# EAGLE board DrivePDU (EAGLE 9.1.3)
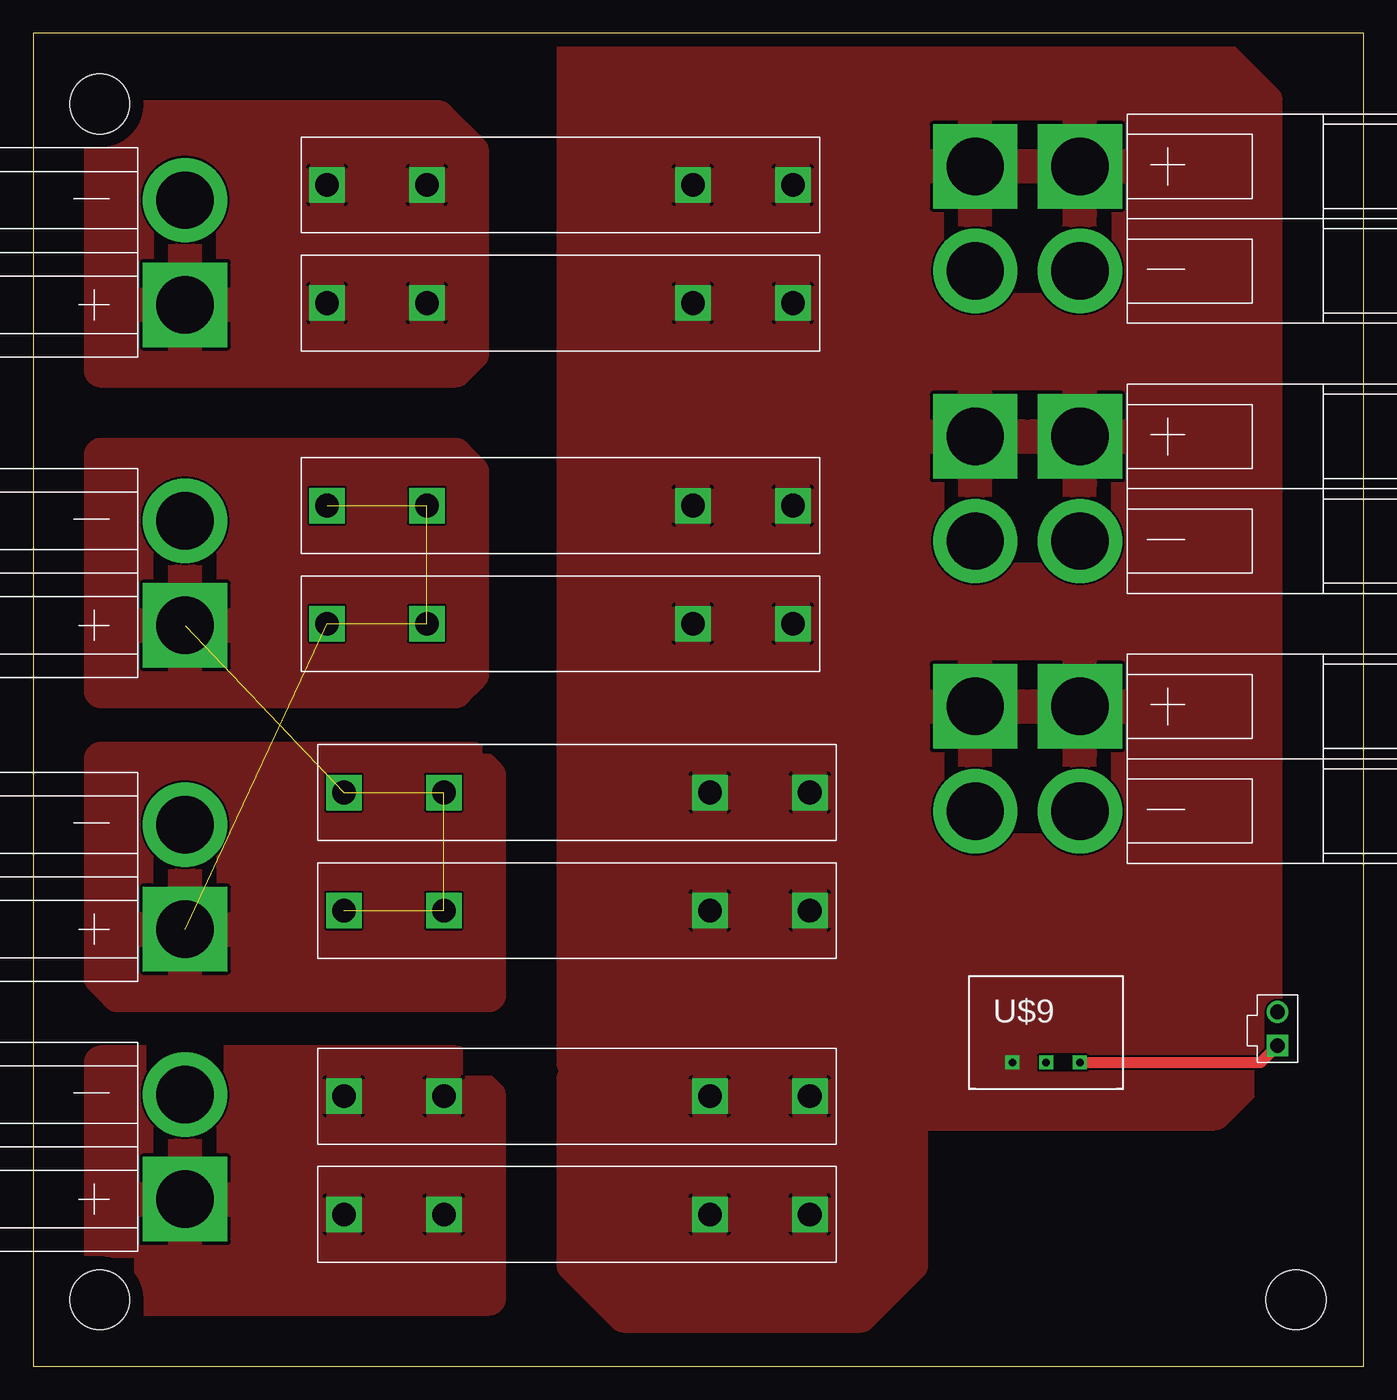
[diagram p0: board, top side]
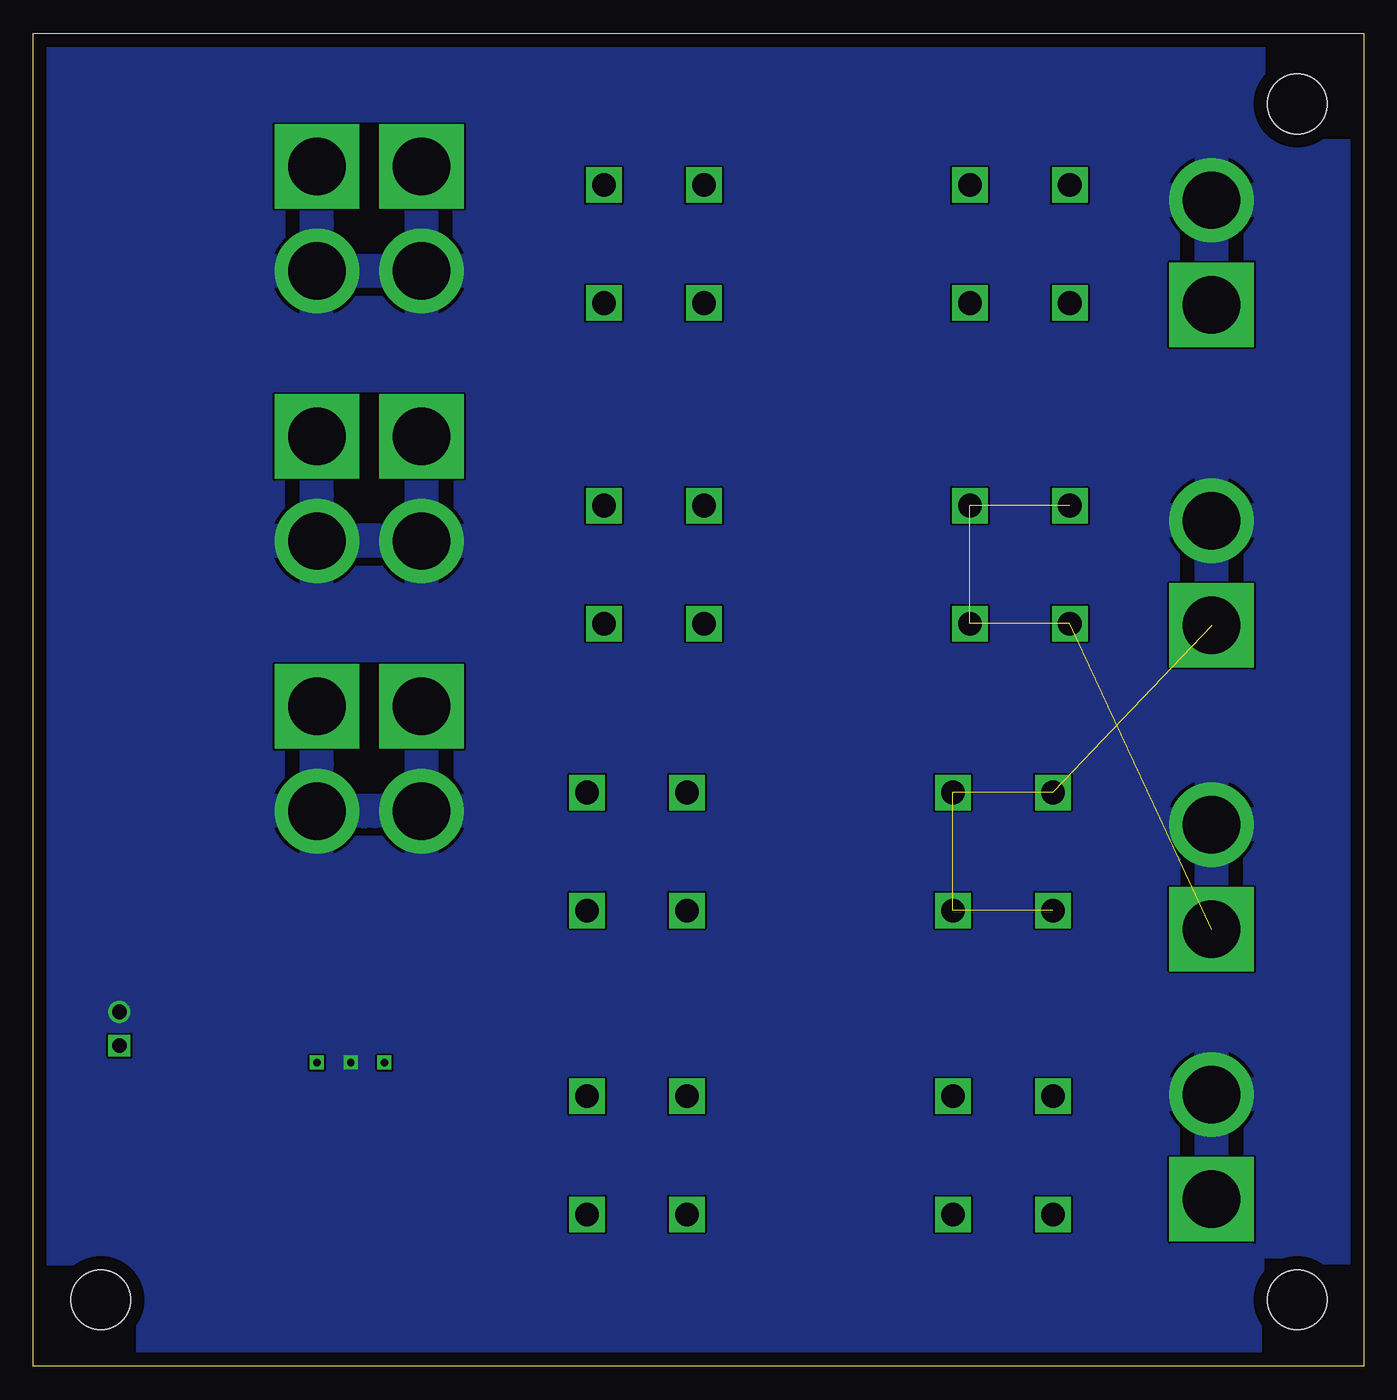
[diagram p1: board, bottom side, seen from below]

Size 100.08 x 100.32 mm. Coordinates in mm from the lower left corner, seen from the top.
Outline: 0,0 100.08,0 100.08,100.32 0,100.32 0,0
Copper layers (1*16): Top 0.035mm / dielectric 1.5mm / Bottom 0.035mm
Design rules "default": minimum track width 6mil, minimum drill 0.35mm, track to track 6mil, track to pad 6mil, pad to pad 6mil, via to via 6mil, smd to smd 6mil, copper to edge 40mil, drill to drill 6mil, minimum pad ring 10mil, minimum via ring 8mil, stop-mask expansion 4mil, vias tented up to drill 0mil, thermal gap 10mil
Holes 4.5 mm at 95,5 5,95 5,5

## Footprints (pad centres in the part's own frame; a part is rotated, then mirrored left to right if it is on the bottom)
PP45_HOR_4GRD = drill 4.318 pad 6.35 square: +_1 0,3.937; +_2 -7.874,3.937 | drill 4.318 pad 6.35: -_1 0,-3.937; -_2 -7.874,-3.937
PP45_HOR_2BOT = drill 4.318 pad 6.35 square: + 0,3.937 | drill 4.318 pad 6.35: - 0,-3.937
AMP-MTE-2MALE = drill 1.092 square: P$1 -1.27,0 | drill 1.092: P$2 1.27,0
R-78E3.3-0.5 = drill 0.55 square: +VIN -2.54,0; GND 0,0; VOUT 2.54,0
01220090Z = drill 1.78 square: P$1 0,0; P$2 0,7.52; P$3 0,27.53; P$4 0,35.05

## Placement (x,y rotation side)
U$1  PP45_HOR_4GRD  [PP45_HOR_4GRD]  78.74,86.36 0 top
U$2  PP45_HOR_4GRD  [PP45_HOR_4GRD]  78.74,66.04 0 top
U$3  PP45_HOR_4GRD  [PP45_HOR_4GRD]  78.74,45.72 0 top
U$4  PP45_HOR_2BOT  [PP45_HOR_2BOT]  11.43,83.82 180 top
U$5  PP45_HOR_2BOT  [PP45_HOR_2BOT]  11.43,59.69 180 top
U$6  PP45_HOR_2BOT  [PP45_HOR_2BOT]  11.43,36.83 180 top
U$7  PP45_HOR_2BOT  [PP45_HOR_2BOT]  11.43,16.51 180 top
U$8  AMP-MTE-2MALE  [AMP-MTE-2MALE]  93.6,25.4 90 top
U$9  R-78E3.3-0.5  [R-78E3.3-0.5]  76.2,22.86 0 top
U$10  30A_FUSE  [01220090Z]  57.15,88.9 90 top
U$11  30A_FUSE  [01220090Z]  57.15,80.01 90 top
U$12  30A_FUSE  [01220090Z]  57.15,64.77 90 top
U$13  30A_FUSE  [01220090Z]  57.15,55.88 90 top
U$14  30A_FUSE  [01220090Z]  58.42,43.18 90 top
U$15  30A_FUSE  [01220090Z]  58.42,34.29 90 top
U$16  30A_FUSE  [01220090Z]  58.42,20.32 90 top
U$17  30A_FUSE  [01220090Z]  58.42,11.43 90 top

## Library data of the parts
U$1-U$8 = SPEAR
U$9-U$17 = SPEAR-PDU

## Nets
+VFUSED: U$1.+_1 U$1.+_2 U$2.+_1 U$2.+_2 U$3.+_1 U$3.+_2 U$9.+VIN U$10.P$1 U$10.P$2 U$11.P$1 U$11.P$2 U$12.P$1 U$12.P$2 U$13.P$1 U$13.P$2 U$14.P$1 U$14.P$2 U$15.P$1 U$15.P$2 U$16.P$1 U$16.P$2 U$17.P$1 U$17.P$2
GND: U$1.-_1 U$1.-_2 U$2.-_1 U$2.-_2 U$3.-_1 U$3.-_2 U$4.- U$5.- U$6.- U$7.- U$8.P$2 U$9.GND
N$2: U$8.P$1 U$9.VOUT
N$3: U$4.+ U$10.P$3 U$10.P$4 U$11.P$3 U$11.P$4
N$4: U$7.+ U$16.P$3 U$16.P$4 U$17.P$3 U$17.P$4
N$5: U$5.+ U$14.P$3 U$14.P$4 U$15.P$3 U$15.P$4
N$6: U$6.+ U$12.P$3 U$12.P$4 U$13.P$3 U$13.P$4

## Tracks (layer width: path | path; a pad name or v marks a point on that pad's centre or on a via)
+VFUSED
  pour Top: 40.64,99.06 40.64,22.86 44.45,19.05 88.9,19.05 92.71,22.86 92.71,95.25 88.9,99.06
  pour Top: 40.64,21.59 40.64,7.62 44.45,3.81 62.23,3.81 63.5,5.08 66.04,7.62 66.04,19.05
GND
  pour Bottom: 1.27,99.06 110.49,99.06 110.49,-1.27 1.27,-1.27
N$2
  Top 0.813: U$9.VOUT 92.33,22.86 U$8.P$1
N$3
  pour Top: 5.08,93.98 5.08,74.93 31.75,74.93 33.02,76.2 33.02,91.44 30.48,93.98 6.35,93.98
N$4
  pour Top: 5.08,22.86 5.08,5.08 34.29,5.08 34.29,20.32 33.02,21.59 31.75,22.86 30.48,22.86
N$5  (4 unrouted)
  pour Top: 5.08,68.58 5.08,50.8 31.75,50.8 33.02,52.07 33.02,67.31 31.75,68.58 6.35,68.58
N$6  (4 unrouted)
  pour Top: 5.08,45.72 5.08,29.21 6.35,27.94 34.29,27.94 34.29,44.45 33.02,45.72 31.75,45.72